# Altium PCB Main.PcbDoc
Units mm, origin at the board's own origin, x right, y up, seen from the top; angles counter-clockwise.
Board outline 70 x 61 mm, 2 copper layers (Top Layer, Bottom Layer); 30 components, 21 nets, 95 pads, 0 vias.
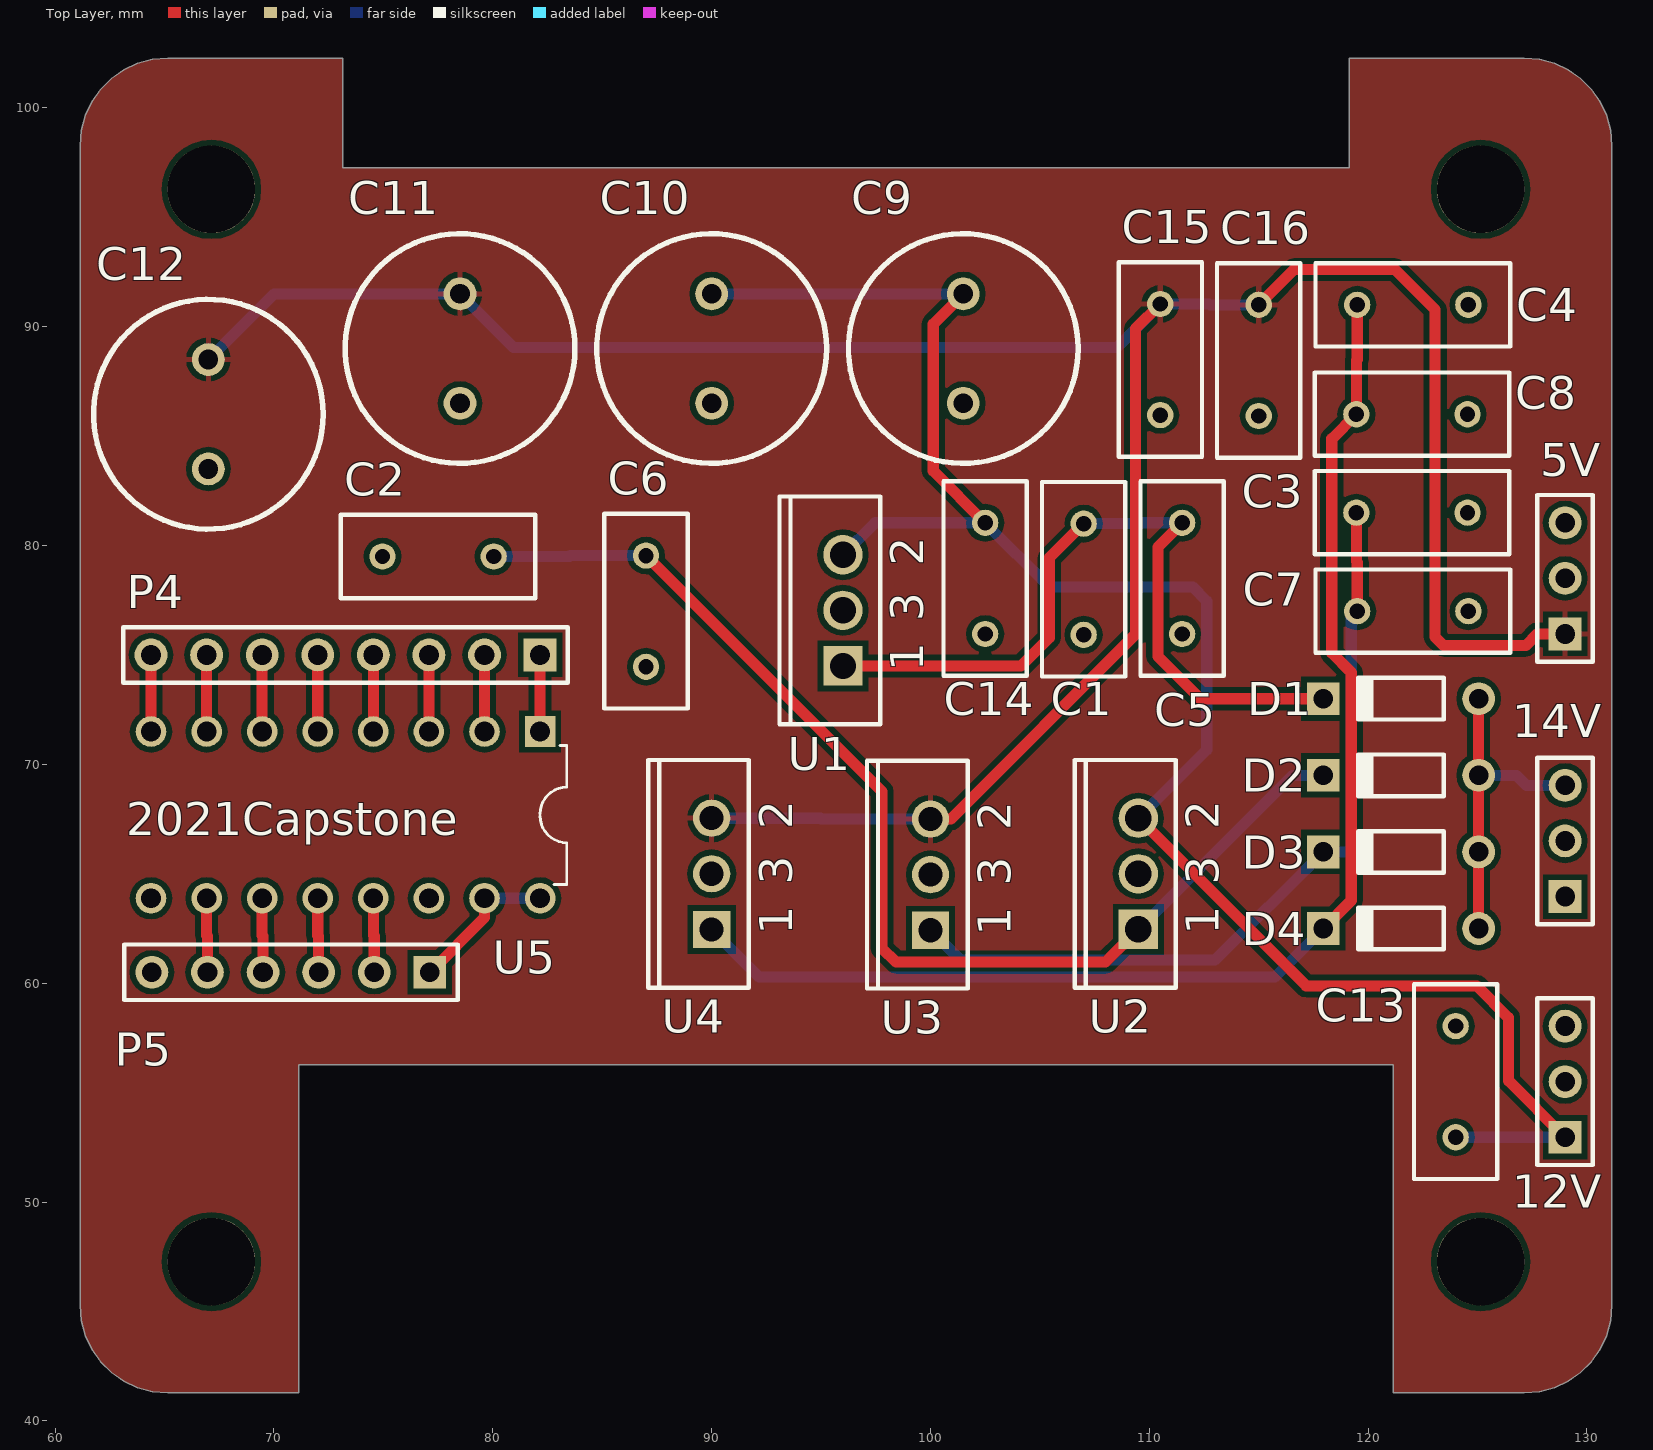
[diagram p0: Top Layer view]
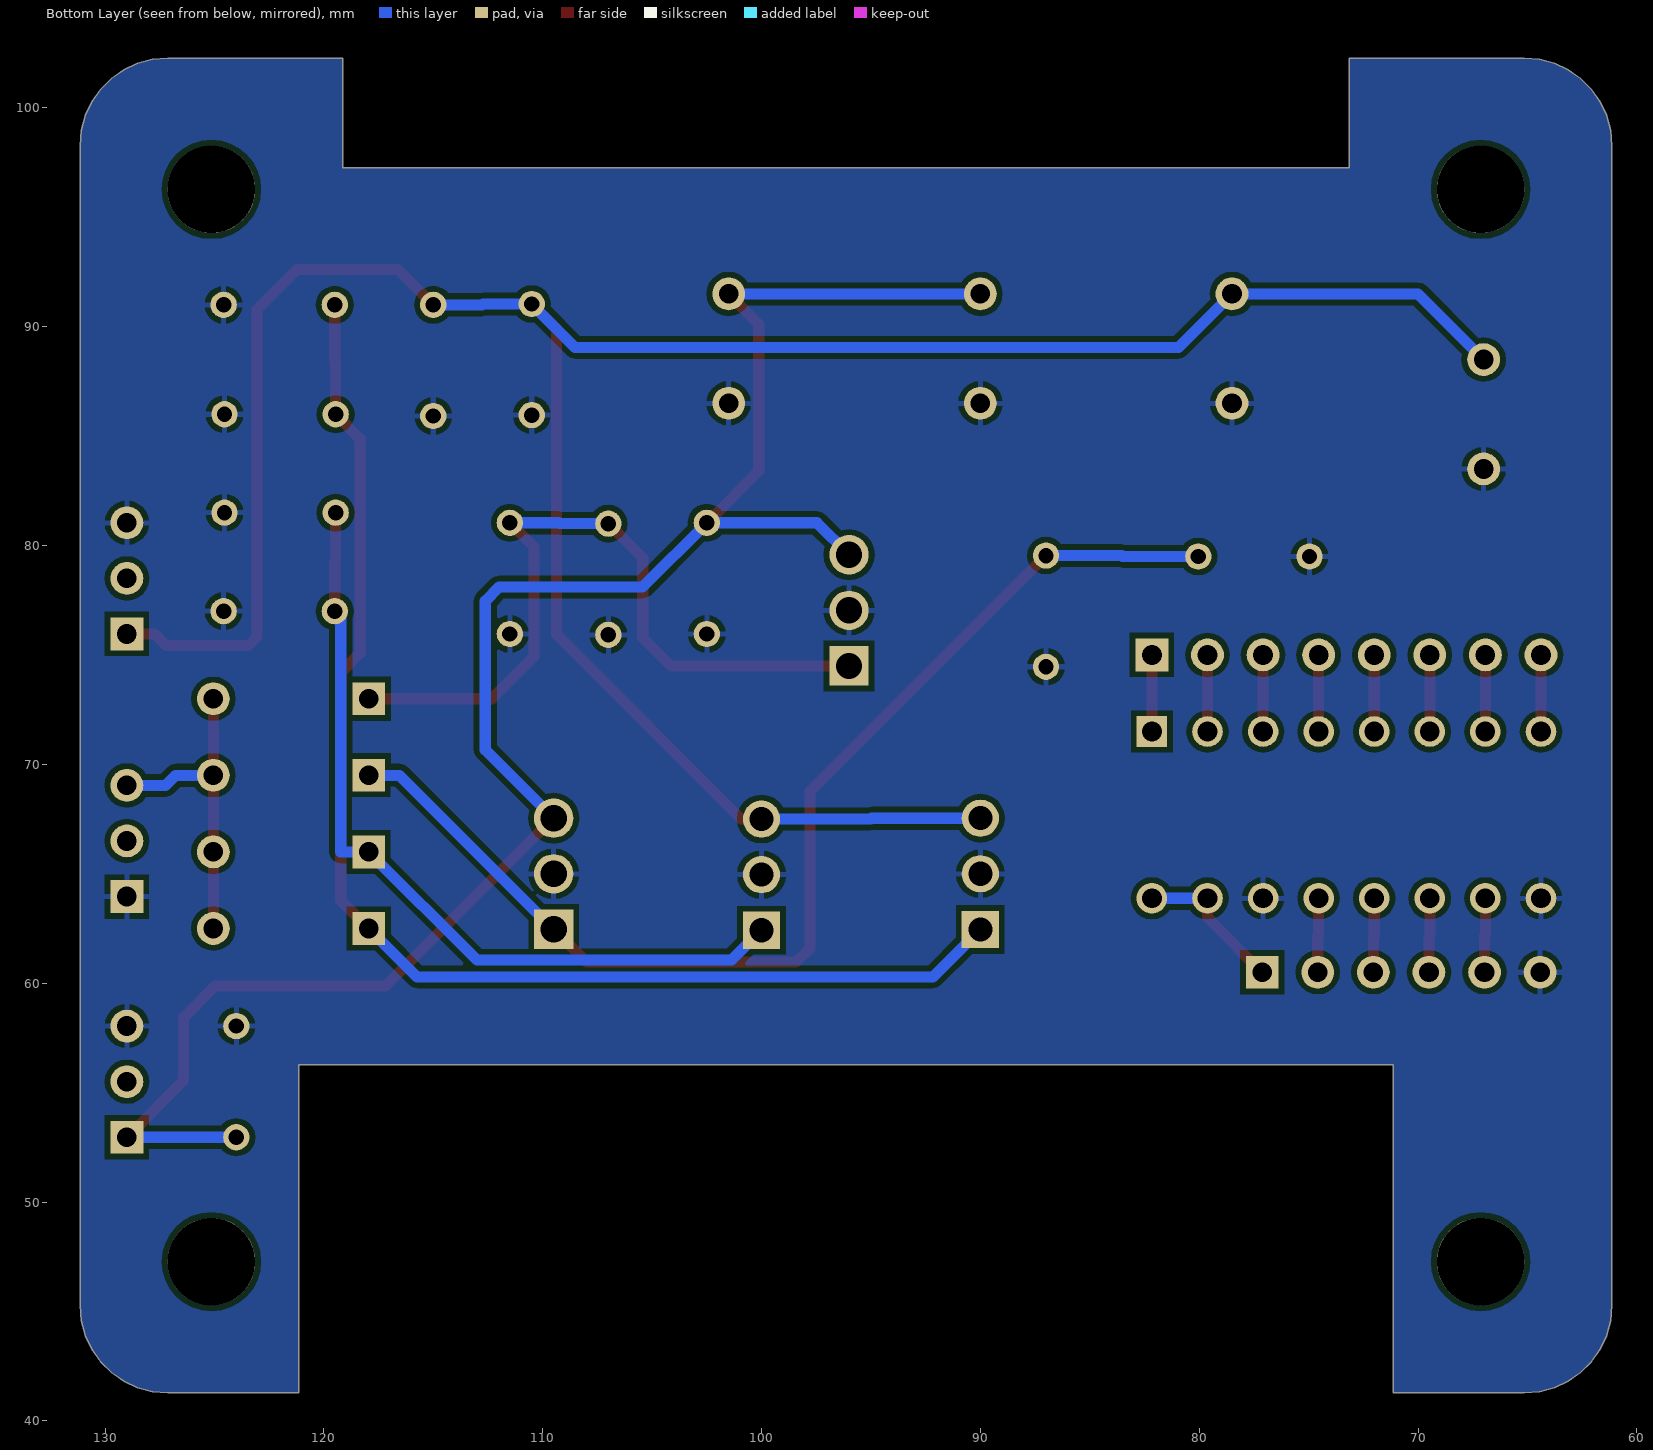
[diagram p1: Bottom Layer view, seen from below]

## Layer stack, top to bottom
Top Solder: solder mask 0.0102, Solder Resist, Dk 3.5
Top Layer: signal copper 0.0356
Dielectric 1: dielectric 0.32, FR-4, Dk 4.8
Bottom Layer: signal copper 0.0356
Bottom Solder: solder mask 0.0102, Solder Resist, Dk 3.5

## Board outline
71.139,41.275 71.139,56.275 121.139,56.275 121.139,41.275 127.139,41.275 127.834,41.336 128.507,41.516 129.139,41.811 129.71,42.211 130.203,42.704 130.603,43.275 130.898,43.907 131.078,44.58 131.139,45.275 131.139,98.275 131.078,98.97 130.898,99.643 130.603,100.275 130.203,100.846 129.71,101.339 129.139,101.739 128.507,102.034 127.834,102.214 127.139,102.275 119.139,102.275 119.139,97.275 73.139,97.275 73.139,102.275 65.139,102.275 64.444,102.214 63.771,102.034 63.139,101.739 62.568,101.339 62.075,100.846 61.675,100.275 61.38,99.643 61.2,98.97 61.139,98.275 61.139,45.275 61.2,44.58 61.38,43.907 61.675,43.275 62.075,42.704 62.568,42.211 63.139,41.811 63.771,41.516 64.444,41.336 65.139,41.275

## Design rules (kind name [scope] priority, off if disabled: settings)
Clearance [All] p1: gap=0.254 ignorepadtopadclearanceinfootprint=FALSE except(0: Arc-Hole Track-Hole SMDPad-Hole THPad-Hole Via-Hole Fill-Hole Poly-Hole Region-Hole Text-Hole)
PolygonConnect [All] p1: connectstyle=Relief reliefconductorwidth=0.254 reliefentries=4 polygonreliefangle="90 Angle" airgapwidth=0.254
RoutingVias [All] p1: holewidth=0.711 width=1.27 viastyle="Through Hole" minholewidth=0.711 minwidth=1.27 maxholewidth=0.711 maxwidth=1.27
SolderMaskExpansion [All] p1: expansion=0.102 istentingtop=FALSE
Width 14v [All] p1: maxlimit=1.016 minlimit=0.508 preferedwidth=0.508
Width 12v [All] p2: maxlimit=1.016 minlimit=0.254 preferedwidth=0.508
Width 5v [All] p3: maxlimit=0.508 minlimit=0.254 preferedwidth=0.508
Width [All] p4: maxlimit=0.254 minlimit=0.254 preferedwidth=0.254
30 further rules are at their usual default settings.

## Classes and differential pairs
component class Main_Circuit: 5V 12V 14V C1 C2 C3 C4 C5 C6 C7 C8 C9 C10 C11 C12 C13 C14 C15 C16 D1 D2 D3 D4 U1 U2 U3 U4
component class Analog: P4 P5 U5

## Components (designator, comment, footprint, x,y, rotation, side; value= is the part's Value field where it differs from the comment)
5V "12V" HDR1X3 129,75.96 r90 top (schematic designator P2)
12V "5V" HDR1X3 129,52.96 r90 top (schematic designator P3)
14V "14V" HDR1X3 129,63.96 r90 top (schematic designator P1)
C1 "Cap" RAD-0.2 107,78.46 r90 top value=0.22uF
C2 "Cap" RAD-0.2 77.5,79.5 r0 top value=0.22uF
C3 "Cap" RAD-0.2 122,81.5 r180 top value=0.22uF
C4 "Cap" RAD-0.2 122.04,91 r180 top value=0.22uF
C5 "Cap" RAD-0.2 111.5,78.5 r90 top value=0.1uF
C6 "Cap" RAD-0.2 87,77 r90 top value=0.1uF
C7 "Cap" RAD-0.2 122.04,77 r180 top value=0.1uF
C8 "Cap" RAD-0.2 122,86 r180 top value=0.1uF
C9 "Cap Pol1" RB5-10.5 101.5,89 r270 top value=10uF
C10 "Cap Pol1" RB5-10.5 90,89 r270 top value=10uF
C11 "Cap Pol1" RB5-10.5 78.5,89 r270 top value=10uF
C12 "Cap Pol1" RB5-10.5 67,86 r270 top value=10uF
C13 "Cap" RAD-0.2 124,55.5 r270 top value=0.1uF
C14 "Cap" RAD-0.2 102.5,78.5 r90 top value=0.1uF
C15 "Cap" RAD-0.2 110.5,88.5 r90 top value=0.1uF
C16 "Cap" RAD-0.2 115,88.46 r90 top value=0.1uF
D1 "Diode 1N4004" DO-35 121.5,73 r180 top
D2 "Diode 1N4004" DO-35 121.5,69.5 r180 top
D3 "Diode 1N4004" DO-35 121.5,66 r180 top
D4 "Diode 1N4004" DO-35 121.5,62.5 r180 top
P4 "Header 8" HDR1X8 82.16,75 r180 top
P5 "Header 6" HDR1X6 77.12,60.5 r180 top
U1 "L7805CP" ISOWATT220AB 96,77.04 r90 top
U2 "L7805CP" ISOWATT220AB 109.5,65 r90 top
U3 "L7812ABV" TO220ABN 100,64.96 r90 top
U4 "L7812ABV" TO220ABN 90,65 r90 top
U5 "MCU-MCP3008-I/P(DIP16-7.62MM)" DIP16-2.54-19.2X7.62MM 73.27,67.69 r180 top

## Footprints (in the part's own frame and the unit in brackets; to place one, negate y for a bottom-side part, rotate by r counter-clockwise, add the part's x,y. Pads: shape width x height; smd on the part's side, far side on the other; paste and mask are expansions set on the pad)
DIP16-2.54-19.2X7.62MM [mm]
  rect 1.4x1.4 hole 0.9: 1(-8.89,-3.81)
  round 1.4 hole 0.9: 2(-6.35,-3.81) 3(-3.81,-3.81) 4(-1.27,-3.81) 5(1.27,-3.81) 6(3.81,-3.81) 7(6.35,-3.81) 8(8.89,-3.81) 9(8.89,3.81) 10(6.35,3.81) 11(3.81,3.81) 12(1.27,3.81) 13(-1.27,3.81) 14(-3.81,3.81) 15(-6.35,3.81) 16(-8.89,3.81)
  silkscreen extent -10.11,-3.17 -8.89,3.18
DO-35 [mm] "Diode, Axial; Body 3.8 x 1.9 mm (LxDia. max), Lead Dia. 0.53 mm (max)"
  round 1.5 hole 0.9: 1(-3.55,0)
  rect 1.5x1.5 hole 0.9: 2(3.55,0)
  silkscreen extent -1.95,-0.95 2.05,0.95
HDR1X3 [mm] "Connector; Header; 3 Position"
  rect 1.5x1.5 hole 0.9: 1(0,0)
  round 1.5 hole 0.9: 2(2.54,0) 3(5.08,0)
  silkscreen extent -1.27,-1.27 6.35,1.27
HDR1X6 [mm] "Connector; Header; 6 Position"
  rect 1.5x1.5 hole 0.9: 1(0,0)
  round 1.5 hole 0.9: 2(2.54,0) 3(5.08,0) 4(7.62,0) 5(10.16,0) 6(12.7,0)
  silkscreen extent -1.27,-1.27 13.97,1.27
HDR1X8 [mm] "Connector; Header; 8 Position"
  rect 1.5x1.5 hole 0.9: 1(0,0)
  round 1.5 hole 0.9: 2(2.54,0) 3(5.08,0) 4(7.62,0) 5(10.16,0) 6(12.7,0) 7(15.24,0) 8(17.78,0)
  silkscreen extent -1.27,-1.27 19.05,1.27
ISOWATT220AB [mm] "TO, Thru-Hole, Vertical, Heatsink Mounted; 3 In-Line Leads; Pitch 2.54 mm; Pin sequence 1, 3, 2"
  rect 1.8x1.8 hole 1.2: 1(-2.54,0)
  round 1.8 hole 1.2: 2(2.54,0) 3(0,0)
  silkscreen extent -5.2,-1.7 5.2,2.9
RAD-0.2 [mm] "Radial Cap, Thru-Hole; 2 Leads; 0.2 in Pin Spacing"
  round 1.2 hole 0.7: 1(-2.54,0) 2(2.54,0)
  silkscreen extent -4.45,-1.9 4.44,1.91
RB5-10.5 [mm] "Capacitor (Radial); 2 Leads"
  round 1.5 hole 0.9: 1(-2.5,0) 2(2.5,0)
  silkscreen extent -5.25,-5.25 5.25,5.25
TO220ABN [mm] "TO, Thru-Hole, Vertical, Heatsink Mounted; 3 In-Line Leads; Pitch 2.54 mm; Pin sequence 1, 3, 2"
  rect 1.7x1.7 hole 1.1: 1(-2.54,0)
  round 1.7 hole 1.1: 2(2.54,0) 3(0,0)
  silkscreen extent -5.2,-1.7 5.2,2.9

## Part data
5V 12V 14V: library part "Header 3", "Header, 3-Pin", LatestRevisionDate=17-Jul-2002, LatestRevisionNote="Re-released for DXP Platform.", Publisher="Altium Limited"
C1 C2 C3 C4 C5 C6 C7 C8 C13 C14 C15 C16: "Capacitor", LatestRevisionDate=17-Jul-2002, LatestRevisionNote="Re-released for DXP Platform.", PackageDescription="Radial Cap, Thru-Hole; 2 Leads; 0.3 in Pin Spacing", PackageReference=RAD-0.3, Published=8-Jun-2000, Publisher="Altium Limited"
C9 C10 C11 C12: "Polarized Capacitor (Radial)", LatestRevisionDate=17-Jul-2002, LatestRevisionNote="Re-released for DXP Platform.", PackageDescription="Polarized Capacitor (Radial); 2 Leads", PackageReference=RB7.6-15, Published=8-Jun-2000, Publisher="Altium Limited"
D1 D2 D3 D4: "1 Amp General Purpose Rectifier", Code_JEDEC=DO-204-AL, ComponentLink1Description="Manufacturer Link", ComponentLink1URL=http://www.fairchildsemi.com/, ComponentLink2Description=Datasheet, ComponentLink2URL=http://www.fairchildsemi.com/ds/1N%2F1N4001.pdf, DatasheetVersion=1998, LatestRevisionDate=17-Jul-2002, LatestRevisionNote="Re-released for DXP Platform.", PackageDescription="Diode, Axial; Body 5.2 x 2.7 mm (LxDia. max), Lead Dia. 0.86 mm (max)", PackageReference=DO-41, PackageVersion=Aug-1999, Published=8-Jun-2000, Publisher="Altium Limited"
P4: "Header, 8-Pin", LatestRevisionDate=17-Jul-2002, LatestRevisionNote="Re-released for DXP Platform.", Publisher="Altium Limited"
P5: "Header, 6-Pin", LatestRevisionDate=17-Jul-2002, LatestRevisionNote="Re-released for DXP Platform.", Publisher="Altium Limited"
U1 U2: "Positive Voltage Regulator", ComponentLink1Description="Manufacturer Link", ComponentLink1URL=http://www.st.com/, DatasheetVersion=Dec-1998, LatestRevisionDate=17-Jul-2002, LatestRevisionNote="Re-released for DXP Platform.", Note="Tab is connected to pin 3 (GND).", PackageDescription="TO, Thru-Hole, Vertical, Heatsink Mounted; 3 In-Line Leads; Pitch 2.54 mm; Pin sequence 1, 3, 2", PackageReference=ISOWATT220AB, PackageVersion=Jul-1998, Published=24-Aug-2001, Publisher="Altium Limited"
U3 U4: "Precision 1A Regulator", ComponentLink1Description="Manufacturer Link", ComponentLink1URL=http://www.st.com/, ComponentLink2Description=Datasheet, ComponentLink2URL=http://www.st.com/stonline/products/literature/ds/2144/l7805ab.pdf, DatasheetVersion=Nov-1999, LatestRevisionDate=17-Jul-2002, LatestRevisionNote="Re-released for DXP Platform.", PackageDescription="TO, Thru-Hole, Vertical, Heatsink Mounted; 3 In-Line Leads; Pitch 2.54 mm; Pin sequence 1, 3, 2", PackageReference=TO220ABN, PackageVersion=Jun-1998, Published=24-Aug-2001, Publisher="Altium Limited"
U5: "10 Bit Analog to Digital Converter 4, 8 Input 1 SAR 16-PDIP", Package="DIP-16 Microchip", Availability=Unavailable, MF=Microchip, MP=MCP3008-I/P, Price=None, SnapEDA_Link=https://www.snapeda.com/parts/MCP3008-I/P/Microchip/view-part/43628/?ref=snap

## Free pads (board coordinates)
  round 4 hole 4: 1(67.139,47.275) 1(67.139,96.275) 1(125.139,47.275) 1(125.139,96.275)

## Nets (pads, with @x,y where several pads share a name; then routed paths per layer and width w, separated by ;. In a path a pad name is that pad's centre, name@x,y a point inside that pad or via, vN(x,y) a via of type N, cw(c..) or ccw(c..) an arc to the next point about the centre after c; other vN are vias at no path point)
5v: 5V.1 C11.1 C12.1 C15.2 C16.2 U3.2 U4.2 | length 120.3
  Top Layer w0.508: U3.2 100.926,67.5 109.372,75.946 109.372,89.912 C15.2 ; C16.2 116.608,92.608 121.234,92.608 123.063,90.78 123.063,75.819 123.444,75.438 127.203,75.438 127.725,75.96 5V.1
  Bottom Layer w0.508: C12.1 70,91.5 C11.1 80.948,89.052 108.512,89.052 C15.2 112.725,91.04 112.765,91 C16.2 ; U4.2 94.971,67.54 95.011,67.5 U3.2
12v: 12V.1 C9.1 C10.1 C13.2 C14.2 U1.2 U2.2 | length 85.7
  Top Layer w0.508: C9.1 100.127,90.127 100.127,83.413 C14.2 ; U2.2 117.172,59.868 124.968,59.868 126.416,58.42 126.416,55.544 12V.1
  Bottom Layer w0.508: C10.1 C9.1 ; U1.2 97.46,81.04 C14.2 105.435,78.105 111.989,78.105 112.624,77.47 112.624,70.664 U2.2 ; C13.2 12V.1
14v: 14V.3 D1.1 D2.1 D3.1 D4.1 | length 14.6
  Top Layer w0.508: D4.1 D3.1 D2.1 D1.1
  Bottom Layer w0.508: D2.1 126.771,69.5 127.231,69.04 14V.3
GND: 5V.3 12V.3 14V.1 C1.1 C2.1 C3.1 C4.1 C5.1 C6.1 C7.1 C8.1 C9.2 C10.2 C11.2 C12.2 C13.1 C14.1 C15.1 C16.1 P5.6 U1.3 U2.3 U3.3 U4.3 U5.9 U5.14
NetC1_2: C1.2 C5.2 D1.2 U1.1 | length 35.3
  Top Layer w0.508: U1.1 104.14,74.5 105.425,75.785 105.425,79.425 C1.2 ; C5.2 110.388,79.928 110.388,74.93 112.318,73 D1.2
  Bottom Layer w0.508: C1.2 109.22,81 109.26,81.04 C5.2
NetC2_2: C2.2 C6.2 D2.2 U2.1 | length 53.4
  Top Layer w0.508: C6.2 97.79,68.75 97.79,61.595 98.425,60.96 108,60.96 U2.1
  Bottom Layer w0.508: C2.2 83.49,79.5 83.53,79.54 C6.2 ; U2.1 116.54,69.5 D2.2
NetC3_2: C3.2 C7.2 D3.2 U3.1 | length 37.5
  Top Layer w0.508: C3.2 119.46,79.263 119.5,79.223 C7.2
  Bottom Layer w0.508: U3.1 101.368,61.052 113.002,61.052 D3.2 119.228,66 119.228,76.728 C7.2
NetC4_2: C4.2 C8.2 D4.2 U4.1 | length 59.6
  Top Layer w0.508: D4.2 119.228,63.778 119.228,74.193 118.339,75.082 118.339,84.879 C8.2 119.46,88.468 119.5,88.508 C4.2
  Bottom Layer w0.508: U4.1 92.17,60.29 115.74,60.29 D4.2
NetP4_1: P4.1 U5.1 | length 3.5
  Top Layer w0.508: U5.1 P4.1
NetP4_2: P4.2 U5.2 | length 3.5
  Top Layer w0.508: U5.2 P4.2
NetP4_3: P4.3 U5.3 | length 3.5
  Top Layer w0.508: U5.3 P4.3
NetP4_4: P4.4 U5.4 | length 3.5
  Top Layer w0.508: U5.4 P4.4
NetP4_5: P4.5 U5.5 | length 3.5
  Top Layer w0.508: U5.5 P4.5
NetP4_6: P4.6 U5.6 | length 3.5
  Top Layer w0.508: U5.6 P4.6
NetP4_7: P4.7 U5.7 | length 3.5
  Top Layer w0.508: U5.7 P4.7
NetP4_8: P4.8 U5.8 | length 3.5
  Top Layer w0.508: U5.8 P4.8
NetP5_1: P5.1 U5.15 U5.16 | length 7
  Top Layer w0.508: P5.1 79.62,63 U5.15
  Bottom Layer w0.508: U5.15 U5.16
NetP5_2: P5.2 U5.13 | length 3.4
  Top Layer w0.508: U5.13 74.54,62.194 74.58,62.154 P5.2
NetP5_3: P5.3 U5.12 | length 3.4
  Top Layer w0.508: U5.12 72,62.194 72.04,62.154 P5.3
NetP5_4: P5.4 U5.11 | length 3.4
  Top Layer w0.508: U5.11 69.46,62.194 69.5,62.154 P5.4
NetP5_5: P5.5 U5.10 | length 3.4
  Top Layer w0.508: U5.10 66.92,62.194 66.96,62.154 P5.5
pads on no net: 5V.2 12V.2 14V.2

## Polygon pours and split planes (outlines as drawn)
5v on Top Layer "5V_L01_P000" (solid, pour order 0): 71.139,41.275 71.139,56.275 121.139,56.275 121.139,41.275 127.139,41.275 127.834,41.336 128.507,41.516 129.139,41.811 129.71,42.211 130.203,42.704 130.603,43.275 130.898,43.907 131.078,44.58 131.139,45.275 131.139,98.275 131.078,98.97 130.898,99.643 130.603,100.275 130.203,100.846 129.71,101.339 129.139,101.739 128.507,102.034 127.834,102.214 127.139,102.275 119.139,102.275 119.139,97.275 73.139,97.275 73.139,102.275 65.139,102.275 64.444,102.214 63.771,102.034 63.139,101.739 62.568,101.339 62.075,100.846 61.675,100.275 61.38,99.643 61.2,98.97 61.139,98.275 61.139,45.275 61.2,44.58 61.38,43.907 61.675,43.275 62.075,42.704 62.568,42.211 63.139,41.811 63.771,41.516 64.444,41.336 65.139,41.275
GND on Bottom Layer "GND_L02_P002" (solid, pour order 2): 71.139,41.275 71.139,56.275 121.139,56.275 121.139,41.275 127.139,41.275 127.834,41.336 128.507,41.516 129.139,41.811 129.71,42.211 130.203,42.704 130.603,43.275 130.898,43.907 131.078,44.58 131.139,45.275 131.139,98.275 131.078,98.97 130.898,99.643 130.603,100.275 130.203,100.846 129.71,101.339 129.139,101.739 128.507,102.034 127.834,102.214 127.139,102.275 119.139,102.275 119.139,97.275 73.139,97.275 73.139,102.275 65.139,102.275 64.444,102.214 63.771,102.034 63.139,101.739 62.568,101.339 62.075,100.846 61.675,100.275 61.38,99.643 61.2,98.97 61.139,98.275 61.139,45.275 61.2,44.58 61.38,43.907 61.675,43.275 62.075,42.704 62.568,42.211 63.139,41.811 63.771,41.516 64.444,41.336 65.139,41.275

## Silkscreen, mask and mechanical layers (free items; w line width, h text height)
Top Overlay:
  text "2021Capstone" at 63.254,66.762 h1.52
Mechanical 1:
  the board outline again, w0.127

## Text inside footprints (layer, text, board x,y; h text height)
U1: Top Overlay "1" at 99.675,74.25 h1.5 r90; Top Overlay "2" at 99.675,79.08 h1.5 r90; Top Overlay "3" at 99.675,76.54 h1.5 r90
U2: Top Overlay "1" at 113.175,62.21 h1.5 r90; Top Overlay "2" at 113.175,67.04 h1.5 r90; Top Overlay "3" at 113.175,64.5 h1.5 r90
U3: Top Overlay "1" at 103.675,62.17 h1.5 r90; Top Overlay "2" at 103.675,67 h1.5 r90; Top Overlay "3" at 103.675,64.46 h1.5 r90
U4: Top Overlay "1" at 93.675,62.21 h1.5 r90; Top Overlay "2" at 93.675,67.04 h1.5 r90; Top Overlay "3" at 93.675,64.5 h1.5 r90